# EAGLE board snarfbasebasics232-v00 (EAGLE 5.11)

Size 55.55 x 50.79 mm. Coordinates in mm from the lower left corner, seen from the top.
Outline: 0,0 55.55,0 55.55,50.79 0,50.79 0,0
Copper layers (1*16): Top 0.0356mm / dielectric 1.5011mm / Bottom 0.0356mm
Design rules "LaenPCBOrder-JCModified": minimum track width 6mil, minimum drill 13mil, track to track 6mil, track to pad 6mil, pad to pad 6mil, via to via 6mil, smd to smd 6mil, copper to edge 15mil, drill to drill 6mil, minimum pad ring 12mil, minimum via ring 7mil, stop-mask expansion 4mil, vias tented up to drill 25mil, thermal gap 10mil
Net classes: 0 default: width 0.356 mm

## Footprints (pad centres in the part's own frame; a part is rotated, then mirrored left to right if it is on the bottom)
SO08 = smd 0.61 x 2.21: 1 -1.905,-2.616; 2 -0.635,-2.616; 3 0.635,-2.616; 4 1.905,-2.616; 5 1.905,2.616; 6 0.635,2.616; 7 -0.635,2.616; 8 -1.905,2.616
SYNSJ-STACK = drill 1.016 pad 1.88 round: G0 0,-7.62; G1 0,-10.16; G2 0,-12.7; G3 0,-15.24; G4 0,-17.78; G5 0,-20.32; G6 0,-22.86; G7 0,-25.4; G8 0,-27.94; G9 0,-30.48; G10 0,-33.02; G11 40.64,-33.02; G12 40.64,-30.48; G13 40.64,-27.94; G14 40.64,-25.4; G15 40.64,-22.86; G16 40.64,-20.32; G17 40.64,-17.78; G18 40.64,-15.24; GND 0,-5.08; GND1 40.64,-5.08; R1 0,0; R2 0,-2.54; R3 0,-35.56; R4 0,-38.1; R5 40.64,-38.1; R6 40.64,-35.56; RESERVED 40.64,-10.16; RESET 40.64,-7.62; VCC 40.64,-12.7
0805 = smd 0.8 x 1.2: 1 -0.9,0; 2 0.9,0
SMA-DIODE = smd 1.27 x 1.47: A -2.15,0; C 2.15,0
1X06 = drill 1.016 pad 1.88 round: 1 0,0; 2 2.54,0; 3 5.08,0; 4 7.62,0; 5 10.16,0; 6 12.7,0
1X12 = drill 1.016 pad 1.88 round: 1 0,0; 2 2.54,0; 3 5.08,0; 4 7.62,0; 5 10.16,0; 6 12.7,0; 7 15.24,0; 8 17.78,0; 9 20.32,0; 10 22.86,0; 11 25.4,0; 12 27.94,0
STAND-OFF = hole 3.302: 0,0
LED-1206 = smd 1.2 x 1.4: A -1.5,0; C 1.5,0
SO016 = smd 0.66 x 2.032: 1 -4.445,-3.315; 2 -3.175,-3.315; 3 -1.905,-3.315; 4 -0.635,-3.315; 5 0.635,-3.315; 6 1.905,-3.315; 7 3.175,-3.315; 8 4.445,-3.315; 9 4.445,3.315; 10 3.175,3.315; 11 1.905,3.315; 12 0.635,3.315; 13 -0.635,3.315; 14 -1.905,3.315; 15 -3.175,3.315; 16 -4.445,3.315
SO20W = smd 0.6 x 3.9: P$1 -5.715,-4; P$2 -4.445,-4; P$3 -3.175,-4; P$4 -1.905,-4; P$5 -0.635,-4; P$6 0.635,-4; P$7 1.905,-4; P$8 3.175,-4; P$9 4.445,-4; P$10 5.715,-4; P$11 5.715,4; P$12 4.445,4; P$13 3.175,4; P$14 1.905,4; P$15 0.635,4; P$16 -0.635,4; P$17 -1.905,4; P$18 -3.175,4; P$19 -4.445,4; P$20 -5.715,4
SYNAPSERFENGINE-THM-SMT = drill 0.8 square: 1 0,0; 24 31.2,0 | drill 0.8 pad 1.422 octagon: 2 0,-2; 3 0,-4; 4 0,-6; 5 0,-8; 6 0,-10; 7 0,-12; 8 0,-14; 9 0,-16; 10 0,-18; 11 0,-20; 12 0,-22; 13 31.2,-22; 14 31.2,-20; 15 31.2,-18; 16 31.2,-16; 17 31.2,-14; 18 31.2,-12; 19 31.2,-10; 20 31.2,-8; 21 31.2,-6; 22 31.2,-4; 23 31.2,-2 | smd 1.67 x 0.89: P1 1.3,0; P2 -1.3,-2; P3 1.3,-4; P4 -1.3,-6; P5 1.3,-8; P6 -1.3,-10; P7 1.3,-12; P8 -1.3,-14; P9 1.3,-16; P10 -1.3,-18; P11 1.3,-20; P12 -1.3,-22; P13 29.9,-22; P14 32.5,-20; P15 29.9,-18; P16 32.5,-16; P17 29.9,-14; P18 32.5,-12; P19 29.9,-10; P20 32.5,-8; P21 29.9,-6; P22 32.5,-4; P23 29.9,-2; P24 32.5,0 | hole 3.2: 3.17,6.16; 28.03,6.16
2X02_PTH = drill 1.016 pad 1.88 octagon: 1 -1.27,-1.27; 2 -1.27,1.27; 3 1.27,-1.27; 4 1.27,1.27
SCREWTERMINAL-3.5MM-2 = drill 1.2 pad 2.032 square: 1 0,0 | drill 1.2 pad 2.032 round: 2 3.5,0
SJ_3 = smd 0.635 x 1.27: 1 -0.889,0; 2 0,0; 3 0.889,0
SJ_2S-NOTRACE = smd 0.635 x 1.27: 1 -0.45,0; 2 0.4,0
TSSOP8 = smd 1.2 x 0.35: 1 -2.925,0.975; 2 -2.925,0.325; 3 -2.925,-0.325; 4 -2.925,-0.975; 5 2.925,-0.975; 6 2.925,-0.325; 7 2.925,0.325; 8 2.925,0.975
1X03 = drill 1.016 pad 1.88 round: 1 0,0; 2 2.54,0; 3 5.08,0
1X02 = drill 1.016 pad 1.88 round: 1 0,0; 2 2.54,0
SOT23-5 = smd 0.55 x 1.2: 1 -0.95,-1.3; 2 0,-1.3; 3 0.95,-1.3; 4 0.95,1.3; 5 -0.95,1.3

## Placement (x,y rotation side)
24LC256  EEPROM-I2CSMD  [SO08]  25.78,47.12 90 top
ADDON  SYNAPSE-SJ-STCKINGD30-1600  [SYNSJ-STACK]  7.62,48.26 0 top
C1  1uF  [0805]  45.72,10.16 90 top
C2  1uF  [0805]  38.1,10.16 90 top
C3  1uF  [0805]  20.32,10.16 90 top
C4  1uF  [0805]  12.7,10.16 90 top
C5  1uF  [0805]  50.8,38.1 270 top
C6  [0805]  66.04,8.89 90 top  (outside the outline)
C7  10uF  [0805]  53.34,38.1 270 top
C8  0.1uF  [0805]  34.29,16.51 90 top
C9  0.1uF  [0805]  34.29,20.32 90 top
C10  0.1uF  [0805]  20.32,16.51 90 top
C11  0.1uF  [0805]  34.29,24.13 90 top
C12  0.1uF  [0805]  22.86,12.7 270 top
D2  [SMA-DIODE]  38.1,6.35 0 top
FTDI  [1X06]  20.32,2.54 0 top
JP1  M12PTH  [1X12]  66.04,45.72 270 top  (outside the outline)
JP2  M12PTH  [1X12]  63.5,16.51 90 top  (outside the outline)
JP6  STAND-OFF  [STAND-OFF]  52.07,3.81 0 top
JP7  M12PTH  [1X12]  71.12,45.72 270 top  (outside the outline)
JP8  M12PTH  [1X12]  59.69,17.78 90 top  (outside the outline)
JP9  STAND-OFF  [STAND-OFF]  2.54,2.54 0 top
JP10  STAND-OFF  [STAND-OFF]  52.07,46.99 0 top
JP11  STAND-OFF  [STAND-OFF]  2.54,45.72 0 top
LED1  [LED-1206]  63.5,8.89 90 top  (outside the outline)
LED2  [LED-1206]  59.69,8.89 90 top  (outside the outline)
MAX232  MAX232SOIC16  [SO016]  26.67,20.32 90 top
PCF2129A  PCF2129ASO20  [SO20W]  25.4,34.29 90 top
R1  [0805]  33.02,33.02 90 top
R2  [0805]  35.56,33.02 90 top
RFE  RFE  [SYNAPSERFENGINE-THM-SMT]  12.32,40.64 0 top
RXTX  SERIAL_CROSSOVER  [2X02_PTH]  24.13,7.62 180 top
SCT  [SCREWTERMINAL-3.5MM-2]  45.72,2.54 90 top
SJ1  [SJ_3]  33.02,27.94 90 top
SJ2  [SJ_3]  35.56,27.94 90 top
SJ3  SOLDERJUMPERNC2  [SJ_2S-NOTRACE]  11.43,45.72 180 top
U$1  LM75AADP  [TSSOP8]  2.54,-5.08 0 top  (outside the outline)
UART0  [1X03]  7.62,5.08 0 top
UART1  [1X03]  7.62,2.54 0 top
VIN  [1X02]  38.1,2.54 0 top
VR1  MCP1802  [SOT23-5]  41.91,10.16 90 top
VR2  MCP1802  [SOT23-5]  16.51,10.16 90 top

## Library data of the parts
24LC256 D2 FTDI JP1 JP2 JP6-JP11 LED1 LED2 MAX232 R1 R2 SCT SJ1-SJ3 UART0 UART1 VIN = SparkFun
ADDON C1-C12 PCF2129A RFE RXTX U$1 VR1 VR2 = 0_jc-custom

## Nets
GND: 24LC256.1 24LC256.2 24LC256.3 24LC256.4 ADDON.GND ADDON.GND1 C1.2 C2.2 C3.2 C4.2 C5.1 C7.1 C10.2 C11.2 C12.2 FTDI.6 JP1.1 JP2.12 JP7.1 JP8.12 MAX232.15 PCF2129A.P$8 RFE.1 RFE.24 SCT.2 UART0.1 UART1.1 VIN.2 VR1.2 VR2.2
GPIO0: ADDON.G0 JP1.2 JP7.2 RFE.2
GPIO1: ADDON.G1 JP1.3 JP7.3 RFE.3
GPIO2: ADDON.G2 JP1.4 JP7.4 RFE.4
GPIO3: ADDON.G3 JP1.5 JP7.5 MAX232.12 RFE.5
GPIO4: ADDON.G4 JP1.6 JP7.6 MAX232.11 RFE.6
GPIO5: ADDON.G5 JP1.7 JP7.7 RFE.7 VR2.3
GPIO6: ADDON.G6 JP1.8 JP7.8 RFE.8
GPIO7: ADDON.G7 JP1.9 JP7.9 MAX232.9 RFE.9 RXTX.4
GPIO8: ADDON.G8 JP1.10 JP7.10 MAX232.10 RFE.10 RXTX.1
GPIO9: ADDON.G9 FTDI.5 JP1.11 JP7.11 RFE.11
GPIO10: ADDON.G10 JP1.12 JP7.12 RFE.12 SJ3.2
GPIO11: ADDON.G11 JP2.1 JP8.1 RFE.13 SJ1.1
GPIO12: ADDON.G12 JP2.2 JP8.2 RFE.14 SJ2.1
GPIO13: ADDON.G13 JP2.3 JP8.3 RFE.15
GPIO14: ADDON.G14 JP2.4 JP8.4 RFE.16
GPIO15: ADDON.G15 JP2.5 JP8.5 RFE.17
GPIO16: ADDON.G16 JP2.6 JP8.6 RFE.18
GPIO17: ADDON.G17 JP2.7 JP8.7 RFE.19 SJ2.3
GPIO18: ADDON.G18 JP2.8 JP8.8 RFE.20 SJ1.3
IFS: PCF2129A.P$5 PCF2129A.P$18
N$1: C8.2 MAX232.3
N$2: D2.A SCT.1 VIN.1
N$3: ADDON.RESERVED JP2.10 JP8.10 RFE.22
N$4: C9.2 MAX232.5
N$5: C10.1 MAX232.2
N$6: C11.1 MAX232.6
N$7: FTDI.1
N$8: C8.1 MAX232.1
N$10: C9.1 MAX232.4
N$11: U$1.3
N$12: ADDON.R2
N$13: 24LC256.7
N$14: U$1.2
N$15: ADDON.R4
N$16: ADDON.R3
N$17: U$1.1
N$18: U$1.8
N$19: U$1.7
N$20: U$1.6
N$21: U$1.5
R6: PCF2129A.P$17 SJ3.1
RESET_L: ADDON.RESET JP2.11 JP8.11 RFE.23
RTCBAT: PCF2129A.P$19
RX0: MAX232.13 UART0.3
RX1: MAX232.8 UART1.3
RXI: FTDI.2 RXTX.3
SCL: 24LC256.6 ADDON.R5 PCF2129A.P$1 R1.1 SJ1.2
SDA: 24LC256.5 ADDON.R6 PCF2129A.P$4 R2.1 SJ2.2
TX0: MAX232.14 UART0.2
TX1: MAX232.7 UART1.2
TXO: FTDI.3 RXTX.2
VCC: JP2.9 JP8.9
VCC3: 24LC256.8 ADDON.VCC C2.1 C5.2 C7.2 C12.1 FTDI.4 MAX232.16 PCF2129A.P$20 R1.2 R2.2 RFE.21 VR1.5
VCC3A: ADDON.R1 C4.1 VR2.5
VIN: C1.1 C3.1 D2.C VR1.1 VR1.3 VR2.1

## Tracks (layer width: path | path; a pad name or v marks a point on that pad's centre or on a via)
GND  (29 unrouted)
GPIO0  (3 unrouted)
GPIO1  (3 unrouted)
GPIO2  (3 unrouted)
GPIO3  (4 unrouted)
GPIO4  (4 unrouted)
GPIO5  (4 unrouted)
GPIO6  (3 unrouted)
GPIO7  (5 unrouted)
GPIO8  (5 unrouted)
GPIO9  (4 unrouted)
GPIO10  (4 unrouted)
GPIO11  (4 unrouted)
GPIO12  (4 unrouted)
GPIO13  (3 unrouted)
GPIO14  (3 unrouted)
GPIO15  (3 unrouted)
GPIO16  (3 unrouted)
GPIO17  (4 unrouted)
GPIO18  (4 unrouted)
IFS  (1 unrouted)
N$1  (1 unrouted)
N$2  (2 unrouted)
N$3  (3 unrouted)
N$4  (1 unrouted)
N$5  (1 unrouted)
N$6  (1 unrouted)
N$8  (1 unrouted)
N$10  (1 unrouted)
R6  (1 unrouted)
RESET_L  (3 unrouted)
RX0  (1 unrouted)
RX1  (1 unrouted)
RXI  (1 unrouted)
SCL  (4 unrouted)
SDA  (4 unrouted)
TX0  (1 unrouted)
TX1  (1 unrouted)
TXO  (1 unrouted)
VCC  (1 unrouted)
VCC3  (12 unrouted)
VCC3A  (2 unrouted)
VIN  (5 unrouted)